# Altium PCB MonModule.PcbDoc (part 2 of 2)
Units mm, origin at the board's own origin, x right, y up, seen from the top; angles counter-clockwise.
Board outline 70 x 45 mm, 4 copper layers (Top Layer, Layer 1, Layer 2, Bottom Layer), stack 0.884 mm thick; 90 components, 60 nets, 303 pads, 301 vias.
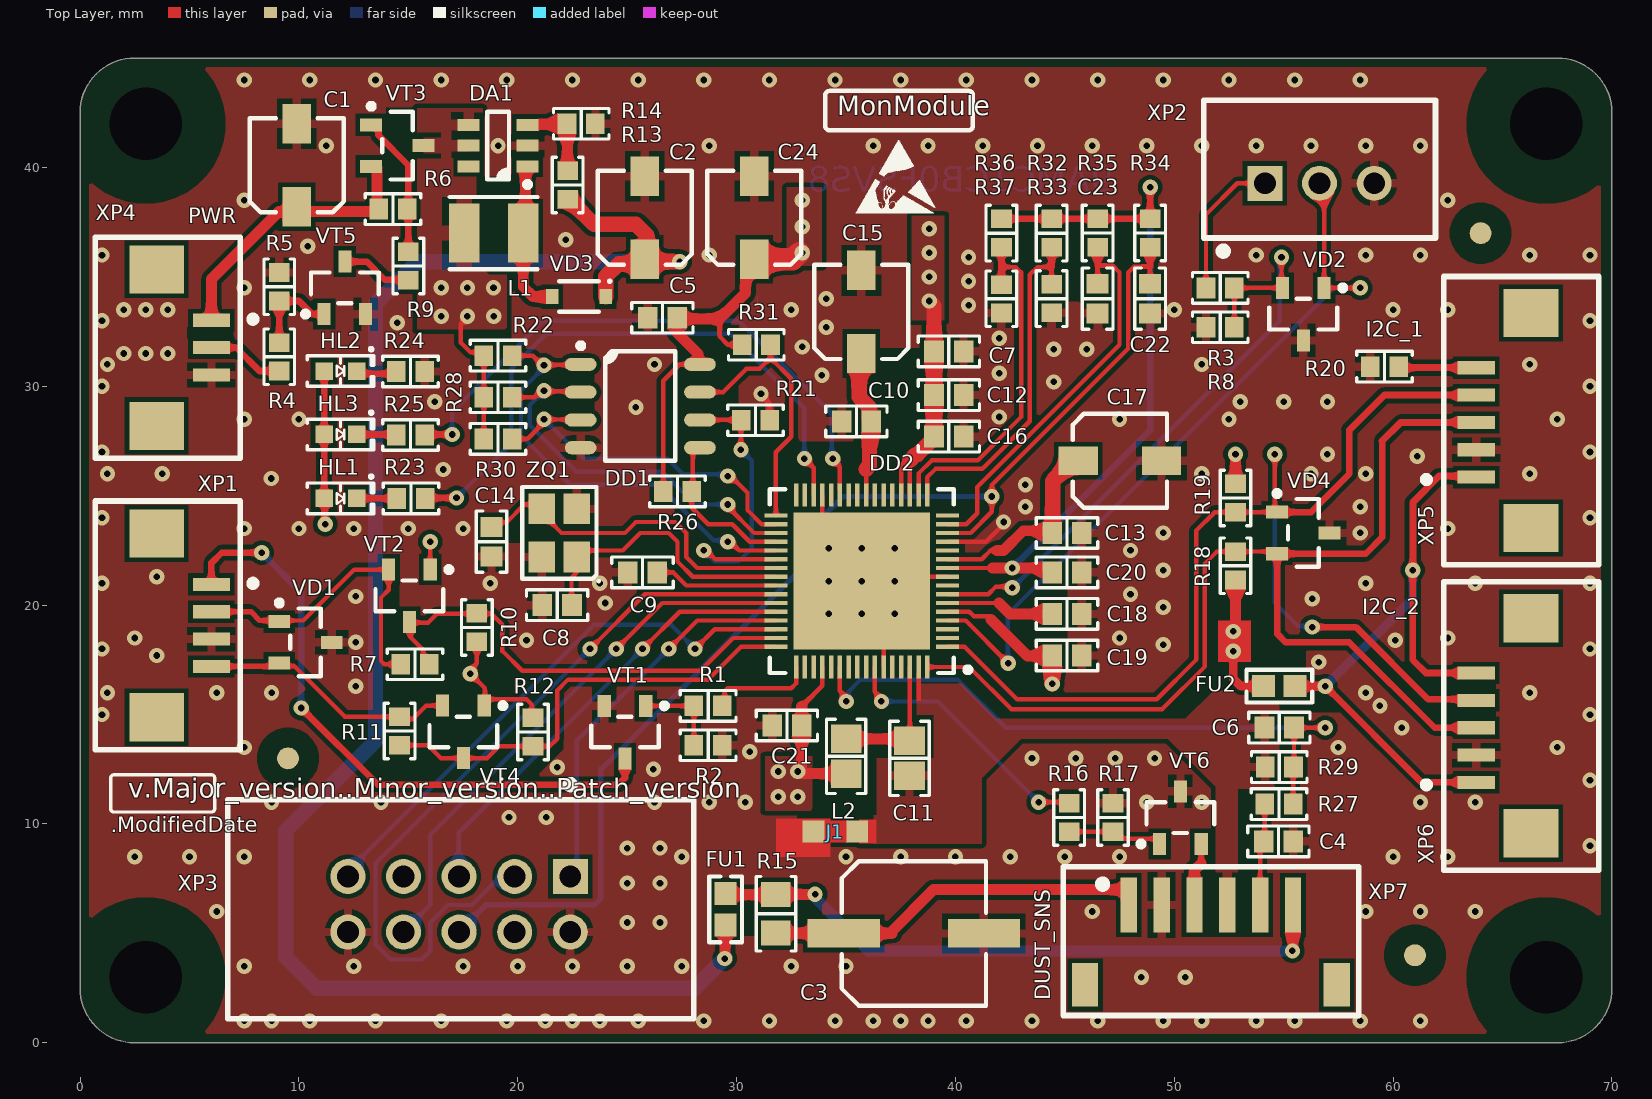
[diagram p0: Top Layer view]

## Polygon pours and split planes (outlines as drawn) (continued)
+3V3 on Top Layer "+3V3_L01_P026" (solid, pour order 26): 15.4,42.7 15.4,32.6 19.505,32.6 19.495,35.098 18.702,35.098 18.4,35.4 18.4,42.7
+3V3 on Top Layer "+3V3_L01_P027" (solid, pour order 27): 39.5,37.8 38,37.8 38,33.014 39.5,33.014 39.5,36.3 39.5,37
+3V3 on Top Layer "+3V3_L01_P024" (solid, pour order 24): 32.3,35.5 33.9,35.5 33.9,39.1 32.3,39.1
+3V3 on Top Layer "+3V3_L01_P025" (solid, pour order 25): 31.3,12 31.3,12.5 31.3,13.1 33.5,13.1 33.5,10.6 31.3,10.6
GND on Bottom Layer "GND_L04_P030" (solid, pour order 30): 0,45 0,0 69.5,0 69.5,45
+3V3 on Layer 2 (split plane): 67.695,44.482 67.889,44.454 68.078,44.406 68.262,44.34 68.439,44.257 68.607,44.156 68.764,44.04 68.908,43.908 69.04,43.764 69.156,43.607 69.257,43.439 69.34,43.262 69.406,43.078 69.454,42.889 69.482,42.695 69.491,42.516 69.49,42.5 69.49,2.5 69.491,2.484 69.482,2.305 69.454,2.111 69.406,1.922 69.34,1.738 69.257,1.561 69.156,1.393 69.04,1.236 68.908,1.092 68.764,0.96 68.607,0.844 68.439,0.743 68.262,0.66 68.078,0.594 67.889,0.546 67.695,0.518 67.516,0.509 67.5,0.51 2.5,0.51 2.484,0.509 2.305,0.518 2.111,0.546 1.922,0.594 1.738,0.66 1.561,0.743 1.393,0.844 1.236,0.96 1.092,1.092 0.96,1.236 0.844,1.393 0.743,1.561 0.66,1.738 0.594,1.922 0.546,2.111 0.518,2.305 0.509,2.484 0.51,2.5 0.51,42.5 0.509,42.516 0.518,42.695 0.546,42.889 0.594,43.078 0.66,43.262 0.743,43.439 0.844,43.607 0.96,43.764 1.092,43.908 1.236,44.04 1.393,44.156 1.561,44.257 1.738,44.34 1.922,44.406 2.111,44.454 2.305,44.482 2.484,44.491 2.5,44.49 67.5,44.49 67.516,44.491
GND on Layer 1 (split plane): 67.695,44.482 67.889,44.454 68.078,44.406 68.262,44.34 68.439,44.257 68.607,44.156 68.764,44.04 68.908,43.908 69.04,43.764 69.156,43.607 69.257,43.439 69.34,43.262 69.406,43.078 69.454,42.889 69.482,42.695 69.491,42.516 69.49,42.5 69.49,2.5 69.491,2.484 69.482,2.305 69.454,2.111 69.406,1.922 69.34,1.738 69.257,1.561 69.156,1.393 69.04,1.236 68.908,1.092 68.764,0.96 68.607,0.844 68.439,0.743 68.262,0.66 68.078,0.594 67.889,0.546 67.695,0.518 67.516,0.509 67.5,0.51 2.5,0.51 2.484,0.509 2.305,0.518 2.111,0.546 1.922,0.594 1.738,0.66 1.561,0.743 1.393,0.844 1.236,0.96 1.092,1.092 0.96,1.236 0.844,1.393 0.743,1.561 0.66,1.738 0.594,1.922 0.546,2.111 0.518,2.305 0.509,2.484 0.51,2.5 0.51,42.5 0.509,42.516 0.518,42.695 0.546,42.889 0.594,43.078 0.66,43.262 0.743,43.439 0.844,43.607 0.96,43.764 1.092,43.908 1.236,44.04 1.393,44.156 1.561,44.257 1.738,44.34 1.922,44.406 2.111,44.454 2.305,44.482 2.484,44.491 2.5,44.49 67.5,44.49 67.516,44.491

## Other copper
Top Layer:
  rectangle net AGND: 35.6,9.1 36.4,10.2
  region net GND: 34.3,8.5 34.3,10.254 31.8,10.254 31.8,8.5
  region net GND: 34.018,25.025 33.818,25.025 33.818,24 34.018,24
  region net GND: 39.643,21.2 39.643,21.4 38.618,21.4 38.618,21.2
  rectangle net GND: 36.618,17.175 36.818,18.2
  rectangle net +3V3: 52,17.4 53.5,19.3
  rectangle net AGND: 38.224,16.5 38.418,16.9
  rectangle net AGND: 38.224,15.6 38.418,16.5
  pour cut-out: 17.511,32.53 17.519,32.523 17.519,31.8 19.681,31.8 19.711,31.83 19.711,32.53
  pour cut-out: 18.1,39.6 18.1,35.5 19.8,35.5 19.8,39.525 19.75,39.575
  pour cut-out: 14,42.75 14.012,42.738 15.122,42.738 15.122,40.489 15.083,40.45 14,40.45
  pour cut-out: 33.753,10.447 33.469,10.731 33.469,15.563 34.356,16.45 37.612,16.45 37.612,14.745 37.657,14.7 37.657,13.3 36.4,13.3 36.4,10.404 34.312,10.404 34.266,10.358
  pour cut-out: 19.5,23.9 19.5,23.588 19.55,22.85 21.65,22.85 21.7,22.9 21.7,23.9
  pour cut-out: 32,27.5 32,24.743 32.343,24.4 37.6,24.4 37.6,27.156 37.883,27.438
  pour cut-out: 18,13.9 18.019,13.881 18.019,12.1 20.767,12.1 22.078,13.411 22.078,13.878 22.1,13.9
  pour cut-out: 27.5,17.806 29.084,17.806 33.441,17.806 33.441,15.807 28.29,15.793 27.5,14.981 27.5,16.394
  pour cut-out: 39.009,26.709 39,26.7 39,24.2 40.9,24.2 41.666,24.966 41.666,26.694
  pour cut-out: 44.795,37.295 44.795,35.268 44.795,33.866 45.947,33.871 45.947,35.469 47.238,35.469 48.225,35.469 48.225,37.295
  pour cut-out: 36.1,31.75 36.1,27.3 38.6,27.3 38.6,31.75
  pour cut-out: 51.55,7.8 51.5,5.1 51.5,4.85 51.9,4.85 51.9,7.8
  pour cut-out: 28.9,6.5 28.9,5.011 29.011,4.9 33.9,4.9 33.9,6.32 33.72,6.5 29.3,6.5
  pour cut-out: 53.104,11.396 53.104,4.85 53.544,4.85 53.6,11.396 53.51,11.396
  pour cut-out: 12.547,14.649 10.711,16.485 10.092,15.908 11.419,14.581 14,12 17.6,12 14.967,14.633
  pour cut-out: 4.9,32.7 4.9,32.2 7,32.2 7,32.7
  pour cut-out: 49.8,15 50.4,15 51.7,16.3 55.6,16.3 56,16.7 56,17.9 55.1,17.9 54.3,18.7 54.3,22.744 56.35,22.744 56.35,23.8 51.6,23.8 51.6,17.1 49.8,15.3
  pour cut-out: 54.208,16.792 53.895,16.479 53.895,16.389 54.597,15.687 55.219,15.687 55.806,15.1 57.8,15.1 57.8,15.6 57.8,15.823 57.392,16.231 56.831,16.792
  pour cut-out: 18.5,30.9 23.5,30.9 23.5,28.5 20.9,28.5 20.3,27.9 18.5,27.9
  pour cut-out: 56.6,19.1 56.6,18 58.7,18 62.2,14.5 64.7,14.5 64.7,17.2 60.3,17.2 58.4,19.1
  pour cut-out: 27.27,32.784 30.084,32.784 30.1,32.8 30.1,28 32,28 31.487,27.487 31.487,22.9 28.533,22.9 27.172,24.261
  pour cut-out: 14.575,19.3 14.575,21.4 13.4,21.4 13.4,15.1 14.4,15.1 16.2,13.3 21.5,13.3 21.5,14.7 21.5,15.6 21.5,16.6 19.908,16.6 18.7,17.808 18.7,19.3
  pour cut-out: 43,22.9 45.1,22.9 45.1,18.2 45,18.2 43,18.2
Bottom Layer:
  pour cut-out: 15.7,35.169 15.7,35.082 15.7,32.6 18.959,32.6 19.471,33.111 19.471,35.169 19.4,35.169
  pour cut-out: 22.686,8.6 23.4,8.6 23.4,12.533 28.367,17.5 28,17.5 27.5,18 22.7,13.2 22.7,13.1
  pour cut-out: 27.675,26.288 27.686,26.3 30.5,26.3 30.5,22.9 29.9,22.3 29.3,22.3 27.7,23.9 27.7,26.263
  pour cut-out: 33.1,29.3 34.1,29.3 34.1,26.7 33.1,26.7
  pour cut-out: 17.73,8.624 21.1,8.603 21.38,8.603 21.38,6.6 18.5,6.6 17.7,6.6
  pour cut-out: 17.1,8.5 17.1,9.495 16.994,9.6 21.194,13.8 22.7,13.8 26.5,17.6 22.3,17.6 13.2,8.5
  pour cut-out: 34.2,16.4 35,16.4 40.7,16.4 40.7,15.6 39.917,15 34.2,15 34.2,15.6
  text "9AMC1CB0FSVS8" at 47.2,38.506 h2

## Silkscreen, mask and mechanical layers (free items; w line width, h text height)
Top Overlay:
  drawing of 19 lines, arcs and shapes, not listed
  text "MonModule" at 34.6,42.1 h1.5
  text "PWR" at 4.95,37.45 h0.7
  text "I2C_1" at 58.75,32.267 h0.7
  text "I2C_2" at 58.587,19.596 h0.7
  text "v.Major_version..Minor_version..Patch_version" at 2.2,10.9 h1.5
  text ".ModifiedDate" at 1.4,9.4 h1.2
  text "DUST_SNS" at 44.333,1.95 h0.7 r90
Bottom Overlay:
  rectangle: 8.6,37.9 26.7,40.4
  text "Зав. №" at 32.1,38.5 h2
Board:
  the board outline again, w0.254